# EAGLE board PCB_V4.0 (EAGLE 9.7.0)
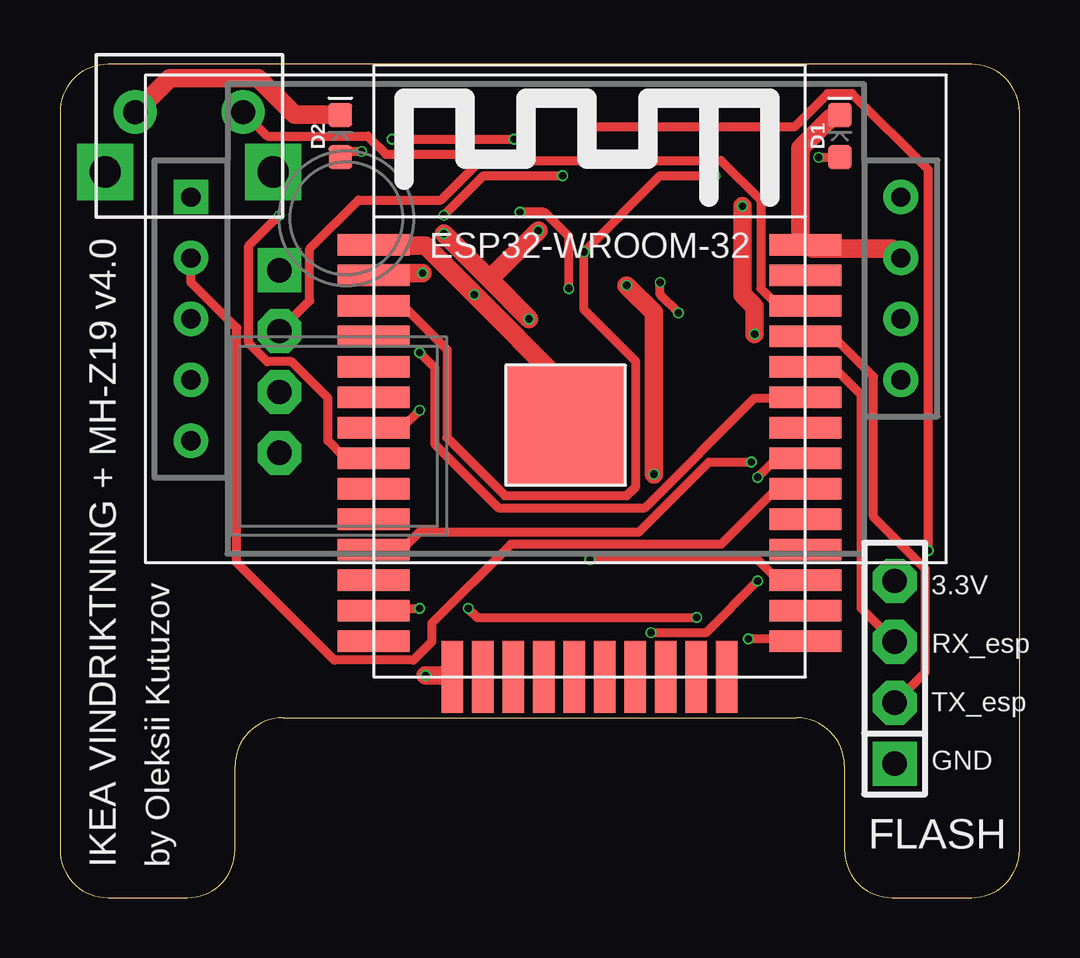
[diagram p0: board, top side]
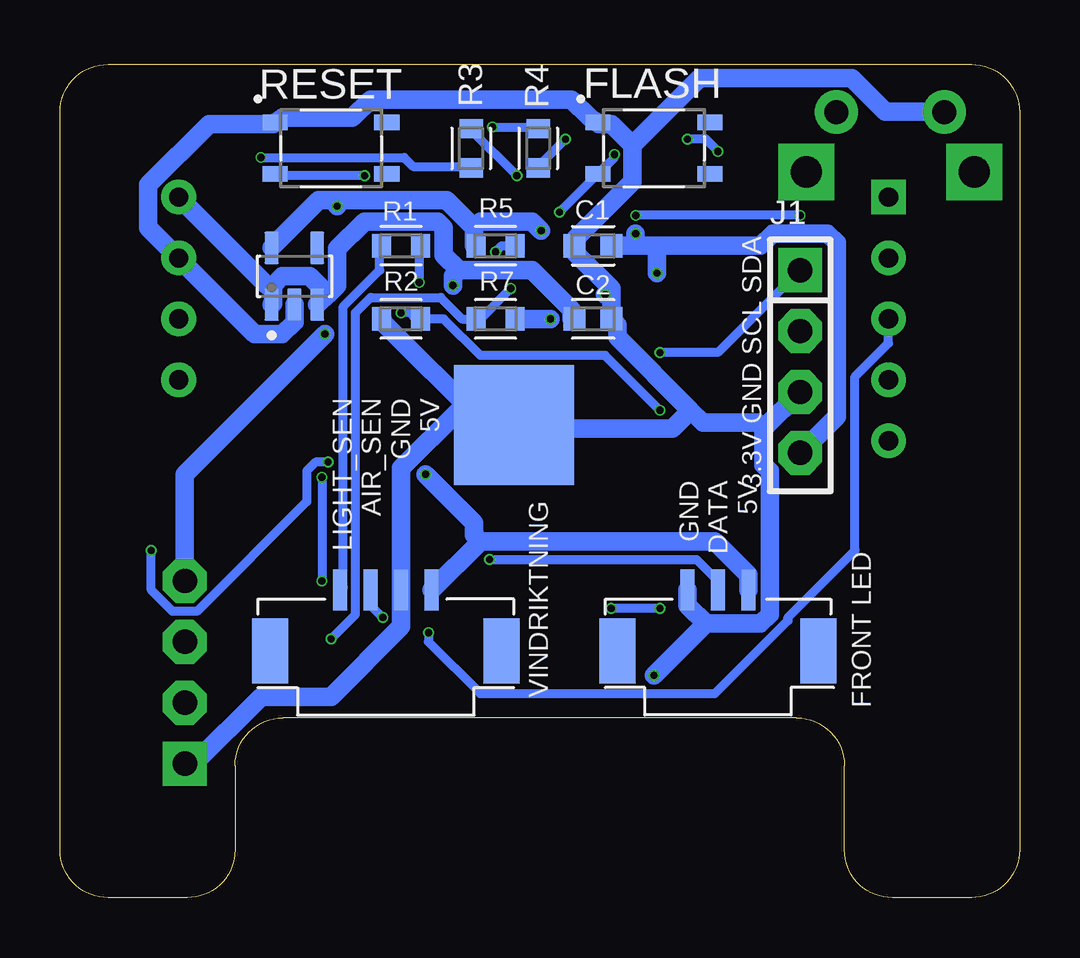
[diagram p1: board, bottom side, seen from below]

Size 40 x 34.75 mm. Coordinates in mm from the lower left corner, seen from the top.
Outline: 32.7,5.5 32.7,2 arc90 34.7,0 38,0 arc90 40,2 40,32.75 arc90 38,34.75 2,34.75 arc90 0,32.75 0,2 arc90 2,0 5.3,0 arc90 7.3,2 7.3,5.5 arc-90 9.3,7.5 30.7,7.5 arc-90 32.7,5.5
Copper layers (1*16): Top 0.035mm / dielectric 1.6mm / Bottom 0.035mm
Design rules "default *": minimum track width 5mil, minimum drill 0.3mm, track to track 5mil, track to pad 5mil, pad to pad 5mil, via to via 5mil, smd to smd 5mil, copper to edge 0.2mm, drill to drill 6mil, minimum pad ring 10mil, minimum via ring 3mil, stop-mask expansion 4mil, vias tented up to drill 0mil, thermal gap 10mil
Net classes: 0 default: width 0.381 mm; 1 5V: width 0.762 mm; 2 GND: width 0.762 mm

## Footprints (pad centres in the part's own frame; a part is rotated, then mirrored left to right if it is on the bottom)
CAPC1608X85 = smd 0.921 x 0.97: 1 -0.775,0; 2 0.775,0
LED-0603 = smd 1 x 1: A -0.877,0; C 0.877,0
SW_SKRPACE010 = smd 1.05 x 0.65: 1 -2.329,1.075; 2 2.329,1.075; 3 -2.329,-1.075; 4 2.329,-1.075
SIP-100-04-40 = drill 1.016 pad 1.778 square: 1 -3.81,0 | drill 1.016 pad 1.778 octagon: 2 -1.27,0; 3 1.27,0; 4 3.81,0
MH-Z19 = drill 0.8 square: 1 29.591,0 | drill 0.8: 2 29.591,2.54; 3 29.591,5.08; 4 29.591,7.62; 5 29.591,10.16; 6 0,0; 7 0,2.54; 8 0,5.08; 9 0,7.62
RESC1608X60 = smd 0.799 x 0.974: 1 -0.815,0; 2 0.815,0
SOT95P285X140-5N = smd 1.35 x 0.6: 1 -1.185,0.95; 2 -1.185,0; 3 -1.185,-0.95; 4 1.185,-0.95; 5 1.185,0.95
JST-GH-4PIN = smd 0.6 x 1.7: 1 1.905,2.286; 2 0.635,2.286; 3 -0.635,2.286; 4 -1.905,2.286 | smd 1.5 x 2.7: P$1 4.826,-0.254; P$2 -4.826,-0.254
JST-GH-3PIN = smd 0.6 x 1.7: 1 1.27,2.54; 2 0,2.54; 3 -1.27,2.54 | smd 1.5 x 2.7: P$1 4.191,0; P$2 -4.191,0
ESP32-WROOM = smd 3 x 0.9: 3V3 0,16.74; EN 0,15.47; GND1 0,18.01; GND3 18,18.01; IO0 18,1.5; IO4 18,2.77; IO5 18,6.58; IO12 0,1.5; IO14 0,2.77; IO16 18,4.04; IO17 18,5.31; IO18 18,7.85; IO19 18,9.12; IO21 18,11.66; IO22 18,15.47; IO23 18,16.74; IO25 0,6.58; IO26 0,5.31; IO27 0,4.04; IO32 0,9.12; IO33 0,7.85; IO34 0,11.66; IO35 0,10.39; NC 18,10.39; RX 18,12.93; SENSOR_VN 0,12.93; SENSOR_VP 0,14.2; TX 18,14.2 | smd 0.9 x 3: CLK 9.635,0; CMD 8.365,0; GND2 3.285,0; IO2 14.715,0; IO13 4.555,0; IO15 13.445,0; SD0 10.905,0; SD1 12.175,0; SD2 5.825,0; SD3 7.095,0 | smd 5 x 5: GND4 8,10.5 | smd 5 x 5 bottom: GND5 8,10.5
SWITCH-MOMENTARY = drill 1.3 square: GND -3.5,2.5; GND_2 3.5,2.5 | drill 1: P$1 -2.25,0; P$2 2.25,0

## Placement (x,y rotation side)
C1  10uF  [CAPC1608X85]  17.78,27.18 180 bottom
C2  10uF  [CAPC1608X85]  17.78,24.13 0 bottom
D1  RED  [LED-0603]  32.51,31.75 90 top
D2  Yellow  [LED-0603]  11.68,31.75 90 top
FLASH  SKRPACE010  [SW_SKRPACE010]  15.24,31.24 0 bottom
J1  F-1X04-SIP-100-40  [SIP-100-04-40]  9.14,22.35 270 bottom
J2  MH-Z19-CO2-NDIR-SENSOR  [MH-Z19]  35.05,29.21 180 top
J3  F-1X04-SIP-100-40  [SIP-100-04-40]  34.8,9.4 90 top
R1  12K  [RESC1608X60]  25.78,27.18 0 bottom
R2  3K  [RESC1608X60]  25.78,24.13 0 bottom
R3  100  [RESC1608X60]  22.86,31.24 90 bottom
R4  100  [RESC1608X60]  20.07,31.24 90 bottom
R5  4.7k  [RESC1608X60]  21.84,27.18 0 bottom
R7  4.7k  [RESC1608X60]  21.84,24.13 0 bottom
RESET  SKRPACE010  [SW_SKRPACE010]  28.7,31.24 0 bottom
U1  AP2112K-3.3TRG1  [SOT95P285X140-5N]  30.23,25.91 90 bottom
U$1  JST-GH-4PIN  [JST-GH-4PIN]  26.42,10.54 0 bottom
U$2  JST-GH-3PIN  [JST-GH-3PIN]  12.57,10.29 0 bottom
U$3  ESP32-WROOM  [ESP32-WROOM]  13.08,9.2 0 top
U$4  MOMENTARY-SWITCH  [SWITCH-MOMENTARY]  5.39,32.76 180 top

## Library data of the parts
C1 C2 = Capacitor; CATEGORY: Capacitor
D1 = SparkFun-LED; PROD_ID: DIO-00819
D2 = SparkFun-LED; PROD_ID: DIO-09003
FLASH RESET = SKRPACE010; MANUFACTURER: ALPS; STANDARD: Maniufacturer Recommendations
J1 J3 = con-headers-jp
J2 = mh-z19
R1-R5 R7 = Resistor; CATEGORY: Resistor; SUB-CATEGORY: Fixed
U1 = AP2112K-3.3TRG1; MANUFACTURER: Diodes Inc.; PARTREV: 2-2
U$1 U$2 = My JST-GH Connectors Library
U$3 = ESP32
U$4 = Tactile Switches

## Nets
+3.3V [5V]: C1.1 J1.4 J3.4 R5.1 R7.2 U1.5 U$3.3V3
+5V [5V]: C2.1 J2.6 U1.1 U1.3 U$1.1 U$2.1
ADC: R1.2 R2.2 U$3.IO35
ESP_RX: J3.3 U$3.RX
ESP_TX: J3.2 U$3.TX
GND [GND]: C1.2 C2.2 D1.C D2.C FLASH.1 J1.3 J2.7 J3.1 R2.1 RESET.1 U1.2 U$1.2 U$2.3 U$3.GND1 U$3.GND2 U$3.GND3 U$3.GND4 U$3.GND5 U$4.P$2
GPIO0: FLASH.3 R7.1 U$3.IO0 U$4.P$1
GPIO14: U$1.3 U$3.IO14
GPIO16: U$2.2 U$3.IO16
GPIO18: J2.2 U$3.IO18
GPIO19: J2.3 U$3.IO19
GPIO26: R4.2 U$3.IO26
GPIO32: R3.2 U$3.IO32
LIGHT_SENSOR: R1.1 U$1.4
N$4: D1.A R3.1
N$5: D2.A R4.1
RESET: R5.2 RESET.3 U$3.EN
SCL: J1.2 U$3.IO22
SDA: J1.1 U$3.IO21
VO: J2.1

## Tracks (layer width: path | path; a pad name or v marks a point on that pad's centre or on a via)
+3.3V  (via drill 0.3)
  Top 0.762: v16,27.69 17.91,25.78 | 17.91,25.78 v19.56,24.13 | v15.11,26.04 13.08,26.04 U$3.3V3 | v28.96,23.5 28.96,24.64 28.45,25.15 v28.45,28.83 | v19.94,27.81 17.91,25.78
  Bottom 0.762: 15.11,27.18 10.79,27.18 10.29,27.69 8,27.69 7.62,27.3 7.62,20.07 J1.4 | 15.11,27.18 16,27.18 | 16,27.18 C1.1 | v19.56,24.13 R7.2 | v16,27.69 16,27.18 | 15.11,27.18 v15.11,26.04 | 22.73,27.94 22.73,27.18 R5.1 | 22.73,27.94 23.88,29.08 28.45,29.08 | 28.45,29.08 29.21,29.08 31.11,27.18 U1.5 | J3.4 34.8,17.65 v28.96,23.5 | v28.45,28.83 28.45,29.08 | v19.94,27.81 20.32,28.19 22.48,28.19 22.73,27.94
+5V  (via drill 0.3)
  Top 0.762: v24.77,17.65 24.77,24.38 v23.62,25.53
  Bottom 0.762: U$2.1 11.3,13.46 12.7,14.86 22.48,14.86 | U$1.1 22.48,14.86 | 23.37,26.16 20.32,26.16 18.67,24.51 18.67,24.13 C2.1 | 23.37,26.16 24,26.8 24,27.94 24.26,28.19 27.3,28.19 28.45,27.05 28.45,25.53 28.83,25.15 | 28.83,25.15 29.21,24.77 U1.3 | 31.11,25.53 31.11,24.77 U1.1 | 31.11,25.53 30.73,25.91 29.59,25.91 28.83,25.15 | J2.6 31.37,25.53 31.11,25.53 | v24.77,17.65 22.73,15.62 22.73,15.11 22.48,14.86 | v23.62,25.53 23.62,25.91 23.37,26.16
ADC  (via drill 0.3)
  Top 0.381: v14.99,20.32 14.35,19.68 13.08,19.68 U$3.IO35 | v25.02,25.65 25.02,25.15 v25.78,24.38
  Bottom 0.381: v14.99,20.32 17.27,22.61 22.48,22.61 24,24.13 R2.2 25.15,24.13 25.4,24.38 v25.78,24.38 | v25.02,25.65 25.02,27.18 R1.2
ESP_RX
  Top 0.381: J3.3 33.4,12.06 33.4,20.95 32.26,22.1 31.11,22.1 U$3.RX
ESP_TX
  Top 0.381: J3.2 36.07,9.4 36.07,13.72 33.91,15.88 33.91,21.72 32.26,23.37 31.11,23.37 U$3.TX
GND  (via drill 0.3)
  Top 0.762: U$3.GND1 13.08,27.18 15.24,27.18 v17.27,25.15 20.95,21.46 20.95,19.81 U$3.GND4 | D1.C 32.51,32.51 32.13,32.51 30.86,31.24 30.86,27.43 30.99,27.3 U$3.GND3 31.37,27.05 34.67,27.05 J2.7 | D2.C 9.78,32.64 8.26,34.16 4.57,34.16 3.17,32.77 U$4.P$2 | v15.24,9.27 16.26,9.27 U$3.GND2
  Bottom 0.762: R2.1 26.54,24.13 26.54,24 22.35,19.81 21.08,19.81 U$3.GND4 | U$3.GND4 23.37,20.32 25.78,17.91 U$1.2 25.78,11.3 28.7,8.38 31.62,8.38 34.42,5.59 J3.1 | U1.2 30.23,24 30.73,23.5 31.88,23.5 J2.7 36.32,27.94 36.32,29.72 33.78,32.26 31.11,32.26 RESET.1 30.73,32.51 27.81,32.51 27.05,33.27 18.67,33.27 17.91,32.51 FLASH.1 17.53,32.26 17.02,32.26 16.13,31.37 | 17.02,25.15 17.02,25.4 18.54,26.92 C1.2 18.54,27.43 16.13,29.84 16.13,31.37 | 17.02,25.15 C2.2 16.76,23.88 16.76,23.37 13.72,20.32 | U$2.3 13.84,12.19 13.08,11.43 | 13.08,11.43 10.79,11.43 10.41,11.81 10.41,17.78 10.67,18.03 10.67,19.56 | J1.3 10.67,19.56 | 13.08,11.43 v15.24,9.27 | 13.72,20.32 13.21,19.81 10.92,19.81 10.67,19.56 | 16.13,31.37 13.34,34.16 6.99,34.16 5.59,32.77 3.17,32.77 U$4.P$2 | v17.27,25.15 17.02,25.15 | 13.72,20.32 14.48,19.56 20.7,19.56 U$3.GND4
GPIO0  (via drill 0.3)
  Top 0.381: v16.89,30.99 13.59,30.99 12.83,31.75 8.64,31.75 7.75,32.64 U$4.P$1 | v28.7,10.79 30.99,10.79 U$3.IO0 | v19.18,28.57 20.19,28.57 21.21,27.56 v21.21,25.4
  Bottom 0.381: v16.89,30.99 16.89,30.86 17.53,30.23 FLASH.3 17.65,30.1 v19.18,28.57 | v28.7,10.79 27.69,11.81 27.69,24.38 27.05,25.02 24.13,25.02 23.24,24.13 R7.1 22.48,24.13 v21.21,25.4
GPIO14  (via drill 0.3)
  Top 0.381: v26.54,11.68 17.4,11.68 v17.02,12.06 | v14.99,12.06 13.08,12.06 U$3.IO14
  Bottom 0.381: U$1.3 27.05,12.19 v26.54,11.68 | v14.99,12.06 v17.02,12.06
GPIO16  (via drill 0.3)
  Top 0.381: v22.1,14.1 29.08,14.1 29.84,13.34 30.99,13.34 U$3.IO16
  Bottom 0.381: U$2.2 12.57,13.21 13.46,14.1 v22.1,14.1
GPIO18
  Top 0.381: J2.2 5.46,25.65 7.37,23.75 7.37,13.97 11.43,9.91 14.73,9.91 15.49,10.67 15.49,11.43 18.8,14.73 27.56,14.73 29.84,17.02 30.99,17.02 U$3.IO18
GPIO19  (via drill 0.3)
  Top 0.381: v24.64,11.05 26.92,11.05 v29.08,13.21 | v29.08,17.53 29.84,18.29 30.99,18.29 U$3.IO19
  Bottom 0.381: J2.3 5.46,23.11 6.86,21.72 6.86,14.48 9.65,11.68 9.65,11.56 12.7,8.51 22.48,8.51 24.64,10.67 v24.64,11.05 | v29.08,17.53 v29.08,13.21
GPIO26  (via drill 0.3)
  Top 0.381: v21.97,32.13 30.61,32.13 32,33.53 33.02,33.53 36.2,30.35 v36.2,14.48 | v28.83,18.16 27.05,18.16 24.13,15.24 14.99,15.24 14.35,14.61 13.08,14.61 U$3.IO26
  Bottom 0.381: v21.97,32.13 20.07,32.13 R4.2 | v36.2,14.48 36.2,12.83 35.31,11.94 34.29,11.94 29.72,16.51 29.72,17.78 29.34,18.16 v28.83,18.16
GPIO32  (via drill 0.3)
  Top 0.381: v20.95,30.1 17.65,30.1 v16,28.45 | v9.14,28.45 7.87,27.18 7.87,23.11 8.64,22.35 9.65,22.35 11.18,20.83 11.18,19.05 11.81,18.41 12.95,18.41 U$3.IO32
  Bottom 0.381: v20.95,30.1 22.86,32 R3.2 | v9.14,28.45 v16,28.45
LIGHT_SENSOR
  Bottom 0.381: U$1.4 28.19,12.95 28.19,24.64 26.67,26.16 26.67,27.18 R1.1
N$4  (via drill 0.3)
  Top 0.381: v31.62,30.86 D1.A
  Bottom 0.381: v31.62,30.86 25.65,30.86 25.27,30.48 22.86,30.48 R3.1
N$5  (via drill 0.3)
  Top 0.381: v13.84,31.62 v18.92,31.62 | v12.57,31.11 11.81,31.11 11.68,30.99 D2.A
  Bottom 0.381: v18.92,31.62 20.07,30.48 R4.1 | v13.84,31.62 13.08,31.62 v12.57,31.11
RESET  (via drill 0.3)
  Top 0.381: U$3.EN 13.08,24.64 14.35,24.64 16.13,22.86 16.13,19.18 18.54,16.76 23.62,16.76 24,17.14 24,22.35 21.84,24.51 v21.84,26.92 25.02,30.1 v27.3,30.1
  Bottom 0.381: R5.2 21.59,27.18 v21.84,26.92 | v27.3,30.1 30.99,30.1 RESET.3
SCL
  Top 0.381: J1.2 10.41,24.89 10.41,27.05 12.45,29.08 15.88,29.08 17.53,30.73 27.56,30.73 29.21,29.08 29.21,25.4 29.84,24.77 30.99,24.77 U$3.IO22
SDA  (via drill 0.3)
  Top 0.381: v14.99,22.73 15.62,22.1 15.62,18.92 18.29,16.26 24.38,16.26 28.96,20.83 30.99,20.83 U$3.IO21
  Bottom 0.381: v14.99,22.73 12.57,22.73 J1.1

## Text on the board
tNames: 3.3V / / RX_esp / / TX_esp / / GND | FLASH | IKEA VINDRIKTNING + MH-Z19 v4.0 | by Oleksii Kutuzov
bNames: FLASH | LIGHT_SEN / AIR_SEN / GND / 5V | 3.3V GND SCL SDA | GND / DATA / 5V | VINDRIKTNING | FRONT LED